# EAGLE board kegboard-coaster (EAGLE 6.4)
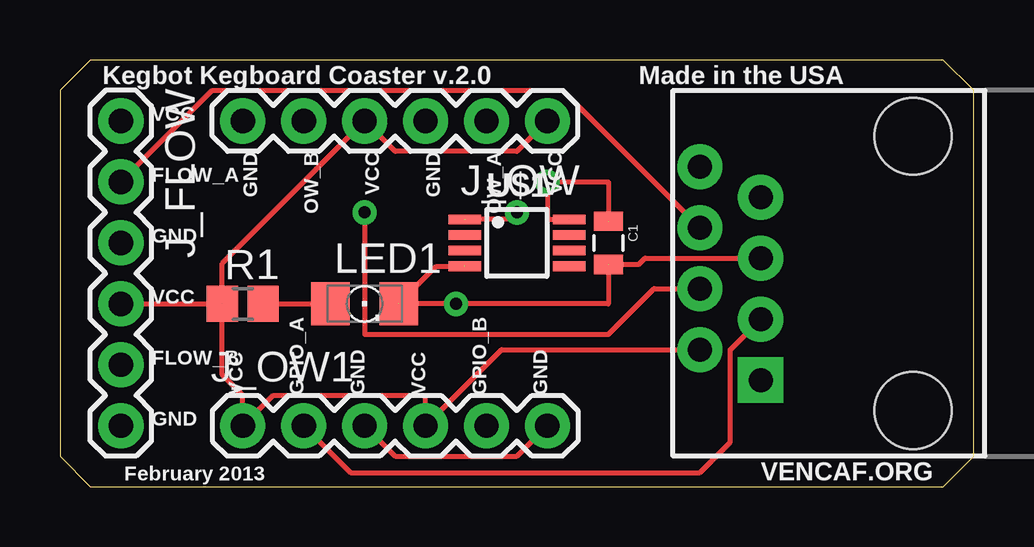
[diagram p0: board, top side]
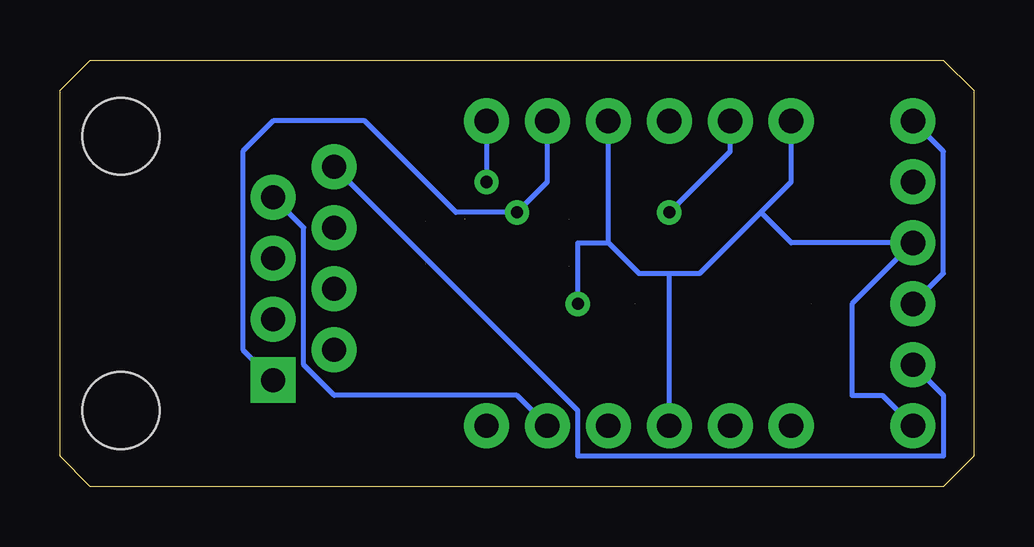
[diagram p1: board, bottom side, seen from below]

Size 38.1 x 17.78 mm. Coordinates in mm from the lower left corner, seen from the top.
Outline: 0,1.27 1.27,0 36.83,0 38.1,1.27 38.1,16.51 36.83,17.78 1.27,17.78 0,16.51 0,1.27
Copper layers (1*16): Top 0.035mm / dielectric 1.5mm / Bottom 0.035mm
Design rules "SparkFun": minimum track width 8mil, minimum drill 20mil, track to track 8mil, track to pad 8mil, pad to pad 8mil, via to via 8mil, smd to smd 8mil, copper to edge 10mil, drill to drill 8mil, minimum pad ring 12mil, minimum via ring 10mil, stop-mask expansion 4mil, vias tented up to drill 25mil, thermal gap 10mil

## Footprints (pad centres in the part's own frame; a part is rotated, then mirrored left to right if it is on the bottom)
0805 = smd 0.8 x 1.2: 1 -0.9,0; 2 0.9,0
RJ45-8 = drill 1 pad 1.88 square: 1 -4.445,6.35 | drill 1 pad 1.88: 2 -3.175,8.89; 3 -1.905,6.35; 4 -0.635,8.89; 5 0.635,6.35; 6 1.905,8.89; 7 3.175,6.35; 8 4.445,8.89 | hole 3.2: -5.715,0; 5.715,0
1X06 = drill 1.016 pad 1.88: 1 0,0; 2 2.54,0; 3 5.08,0; 4 7.62,0; 5 10.16,0; 6 12.7,0
FKIT-LED-1206 = smd 1.6 x 1.803: A -1.422,0; C 1.422,0
R0805 = smd 1.3 x 1.5: 1 -0.85,0; 2 0.85,0
UMAX8 = smd 0.4 x 1.35: 1 -0.975,-2.175; 2 -0.325,-2.175; 3 0.325,-2.175; 4 0.975,-2.175; 5 0.975,2.175; 6 0.325,2.175; 7 -0.325,2.175; 8 -0.975,2.175

## Placement (x,y rotation side)
C1  0.1 uF  [0805]  22.86,10.16 270 top
HEADER-RJ1  RJ45-8PTH  [RJ45-8]  35.56,8.89 90 top
J_FLOW  [1X06]  2.54,15.24 270 top
J_OW  [1X06]  20.32,15.24 180 top
J_OW1  [1X06]  7.62,2.54 0 top
LED1  [FKIT-LED-1206]  12.7,7.62 0 top
R1  1K  [R0805]  7.62,7.62 0 top
U$1  TEMPERATURE-SENSORUMAX8  [UMAX8]  19.05,10.16 270 top

## Library data of the parts
C1 = SparkFun-Passives
HEADER-RJ1 = SparkFun
J_FLOW J_OW J_OW1 = SparkFun-20100412
LED1 = SparkFun-LED
R1 = resistor
U$1 = geoffculp

## Nets
5V: C1.1 HEADER-RJ1.2 J_FLOW.1 J_FLOW.4 J_OW1.1 J_OW1.4 J_OW.1 J_OW.4 R1.1 U$1.8
FLOW_A: HEADER-RJ1.6 J_FLOW.2
FLOW_B: HEADER-RJ1.8 J_FLOW.5
GND: C1.2 HEADER-RJ1.5 J_FLOW.3 J_FLOW.6 J_OW1.3 J_OW1.6 J_OW.3 J_OW.6 LED1.C U$1.4
GPIO_A: HEADER-RJ1.3 J_OW1.2
GPIO_B: HEADER-RJ1.7 J_OW1.5
N$1: LED1.A R1.2
ONEWIRE_A: HEADER-RJ1.1 J_OW.2 U$1.1
ONEWIRE_B: HEADER-RJ1.4 J_OW.5

## Tracks (layer width: path | path; a pad name or v marks a point on that pad's centre or on a via)
5V  (via drill 0.51 pad 1.02)  (3 unrouted)
  Top 0.203: HEADER-RJ1.2 18.41,5.71 J_OW1.4 15.24,3.81 8.89,3.81 J_OW1.1 7.62,3.81 6.77,4.66 R1.1 | J_OW.1 19.05,13.97 13.97,13.97 J_OW.4 6.77,9.31 R1.1 | C1.1 22.86,12.7 v20.32,12.7 20.32,11.13 U$1.8 | J_FLOW.4 R1.1
  Bottom 0.203: J_FLOW.4 1.27,8.89 1.27,13.97 J_FLOW.1 | J_OW.1 v20.32,12.7
FLOW_A
  Top 0.203: J_FLOW.2 6.35,16.51 20.95,16.51 HEADER-RJ1.6
FLOW_B
  Bottom 0.203: J_FLOW.5 1.27,3.81 1.27,1.27 16.51,1.27 16.51,3.17 HEADER-RJ1.8
GND  (via drill 0.51 pad 1.02)  (3 unrouted)
  Top 0.203: HEADER-RJ1.5 24.39,9.53 24.13,9.26 C1.2 22.86,7.62 v16.51,7.62 LED1.C 15.69,9.19 U$1.4 | J_OW1.3 13.97,1.27 19.05,1.27 J_OW1.6
  Bottom 0.203: 15.24,10.16 13.97,8.89 12.7,8.89 | 15.24,10.16 16.51,10.16 v16.51,7.62 | 8.89,11.43 7.62,12.7 J_OW.6 | 8.89,11.43 7.62,10.16 J_FLOW.3 5.08,7.62 5.08,3.81 3.81,3.81 J_FLOW.6 | 12.7,8.89 11.43,8.89 8.89,11.43 | J_OW1.3 12.7,8.89 | 15.24,10.16 J_OW.3
GPIO_A
  Top 0.203: J_OW1.2 12.12,0.58 26.67,0.58 27.94,1.85 27.94,5.71 HEADER-RJ1.3
GPIO_B
  Bottom 0.203: J_OW1.5 19.05,3.81 26.67,3.81 27.94,5.08 27.94,10.79 HEADER-RJ1.7
N$1
  Top 0.203: R1.2 LED1.A
ONEWIRE_A  (via drill 0.51 pad 1.02)  (1 unrouted)
  Top 0.203: v19.05,11.43 18.75,11.13 U$1.1
  Bottom 0.203: HEADER-RJ1.1 30.48,5.71 30.48,13.97 29.21,15.24 25.4,15.24 21.59,11.43 v19.05,11.43 17.78,12.7 J_OW.2
ONEWIRE_B  (via drill 0.51 pad 1.02)
  Top 0.203: v12.7,11.43 12.7,6.35 22.86,6.35 24.77,8.26 HEADER-RJ1.4
  Bottom 0.203: v12.7,11.43 10.16,13.97 J_OW.5

## Text on the board
tPlace: Kegbot Kegboard Coaster v.2.0 | Made in the USA | VCC | GND | OW_B | VCC | GND | OW_A | VCC | FLOW_A | GND | VCC | FLOW_B | VCC | GPIO_A | GND | VCC | GPIO_B | GND | GND | February 2013 | VENCAF.ORG